# Altium PCB arm_v4.PcbDoc (part 2 of 2)
Units mil, origin at the board's own origin, x right, y up, seen from the top; angles counter-clockwise.
Board outline 3620 x 3150 mil, 4 copper layers (Top Layer, Power, GND, Bottom Layer), stack 38.234 mil thick; 65 components, 41 nets, 261 pads, 50 vias.
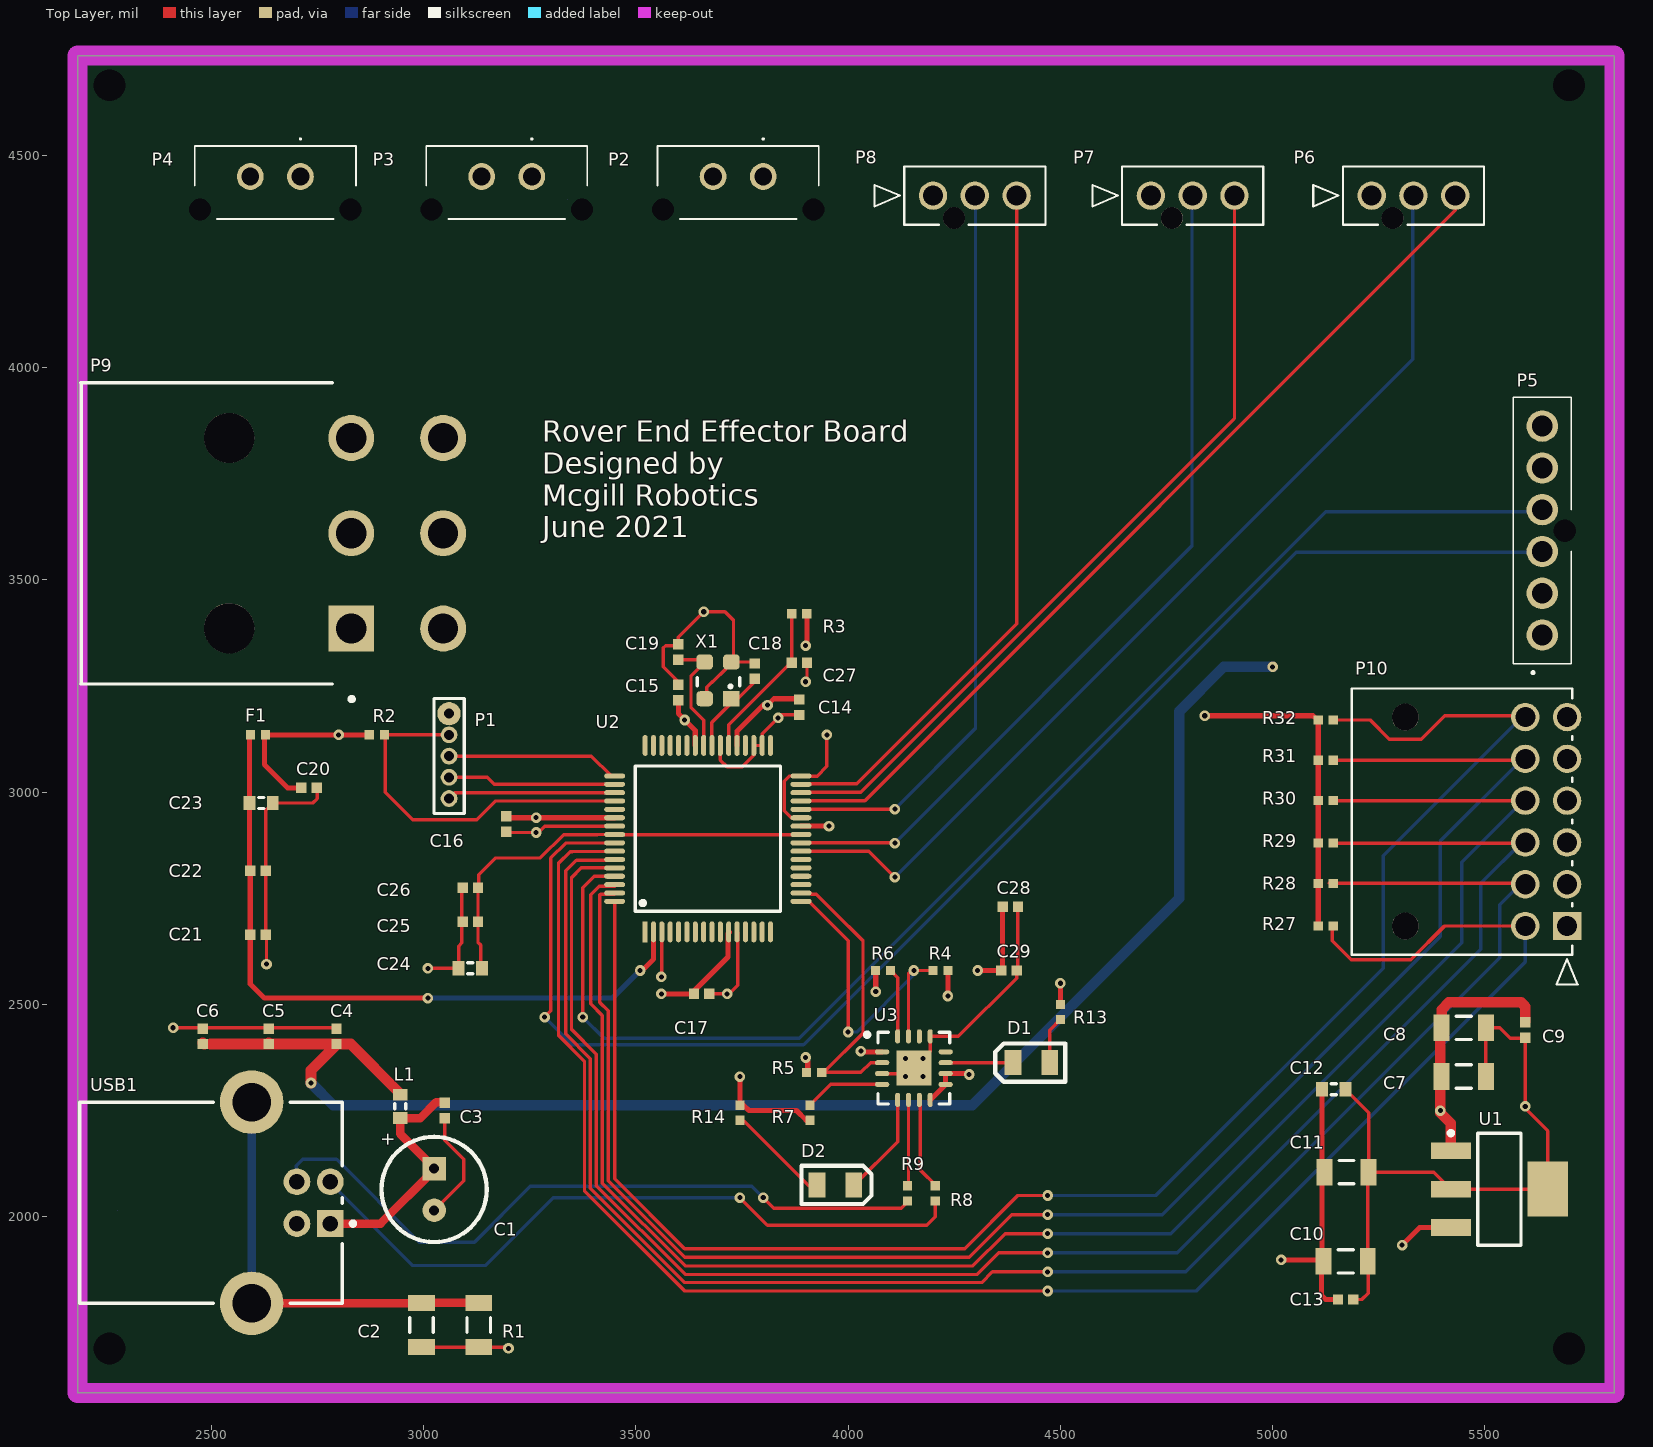
[diagram p0: Top Layer view]

## Via types
v1: diameter 25, hole 12, Top Layer to Bottom Layer, 50 vias

## Nets (pads, with @x,y where several pads share a name; then routed paths per layer and width w, separated by ;. In a path a pad name is that pad's centre, name@x,y a point inside that pad or via, vN(x,y) a via of type N, cw(c..) or ccw(c..) an arc to the next point about the centre after c; other vN are vias at no path point) (continued)
VBUS: C1.1 C3.2 L1.1 USB1.1 | length 563
  Top Layer w20: USB1.1 2898.78,1983.78 C1.1@3025,2110 ; C1.1@3025,2115 2945,2195 L1.1 2992.44,2232.44 3030,2270 C3.2@3045,2270
VCORE: C24.2 C25.2 C26.2 U2.25 U2.56 | length 1014.7
  Top Layer w8: C26.2@3125,2780 3130,2785 3130,2805 3170,2845 3275,2845 3330,2900 3409.8,2900 3410.15,2900.35 U2.56 3450.35,2900.04 3884.96,2900.04 U2.25@3885,2900 ; 3128.11,2670 3128.11,2646.89 3135,2640 3135,2590 C24.2@3140,2585 ; 3128.11,2671.89 C25.2 C26.2
pads on no net: P2.3 P2.4 P3.3 P3.4 P4.3 P4.4 P5.MH1 P6.4 P7.4 P8.4 P9. P10.13 P10.14 U2.1 U2.4 U2.5 U2.6 U2.7 U2.8 U2.9 U2.10 U2.13 U2.14 U2.15 U2.16 U2.19 U2.20 U2.21 U2.22 U2.33 U2.36 U2.43 U2.44 U2.45 U2.46 U2.47 U2.48 U2.53 U3.12 U3.14
copper on no net: | length 2.7
  Top Layer w8: 3889.02,2801.93 3890.95,2800

## Polygon pours and split planes (outlines as drawn)
+24V on Power "Power +24V" (solid, pour order 22): 2730,3475.83 2730,3295 3240,3295 3240,3475.83 4735,3475.83 4735,4595 2250,4595 2245,4590 2245,3475.83
+3.3V on Power "Power +3.3V" (solid, pour order 24): 3243.01,3265 3243.01,3465 4912.65,3465 4912.65,3195.91 5259.89,2870 5259.89,2015 5749.98,2015 5749.98,1795 5750.38,1794.62 5745.46,1790 2330,1790 2330,3265
+5V on Power "Power +5V" (solid, pour order 26): 4945,4575 5750,4575 5750,2030.32 5310,2030.32 5310,2907.82 4945,3272.82
GND on GND "GND +24V" (solid, pour order 30): 2245,3295 2245,4590 2250,4595 4885,4595 4885,3295
GND on GND "GND Main" (solid, pour order 32): 2245,3275 2245,1765 2810,1765 2940,1635 5540,1635 5610,1705 5697.31,1792.31 5748.07,1792.31 5748.07,4573.07 5750,4575 5740,4585 4920,4585 4920,3300 4895,3275
GND on GND "GND Bridge 5" (solid, pour order 44): 3135,3314.43 3135.57,3315 3210,3315 3210,3230 3207.4,3232.6 3135,3232.6
GND on GND "GND Bridge 4" (solid, pour order 42): 2245,3315 2306.26,3315 2306.26,3235.2 2301.06,3230 2245,3230
GND on GND "GND Bridge 2" (solid, pour order 40): 4715,3329.14 4790,3329.14 4790,3219.93 4789.93,3220 4715,3220
GND on GND "GND Bridge 3" (solid, pour order 38): 4985,3399.48 4985,3330 4982.55,3332.45 4844.13,3332.45 4844.13,3398.61 4845,3399.48
GND on GND "GND Bridge 1" (solid, pour order 36): 4835,4585 4835,4505 4975,4505 4980,4510 4980,4585

## Keep-outs
Keep-Out Layer:
  the board outline again, w47.24

## Other copper
Top Layer:
  pour cut-out: 4855,3260

## Silkscreen, mask and mechanical layers (free items; w line width, h text height)
Top Overlay:
  text "Rover End Effector Board / Designed by  / Mcgill Robotics / June 2021" at 3280,3600 h50

## Text inside footprints (layer, text, board x,y; h text height)
C1: Top Overlay "+" at 2930,2165 h30 r90